# Altium PCB HEPA_CONTROL_PCB.PcbDoc (part 1 of 2)
Units mm, origin at the board's own origin, x right, y up, seen from the top; angles counter-clockwise.
Board outline 243.32 x 101.42 mm, 2 copper layers (Top Layer, Bottom Layer); 86 components, 74 nets, 296 pads, 39 vias.
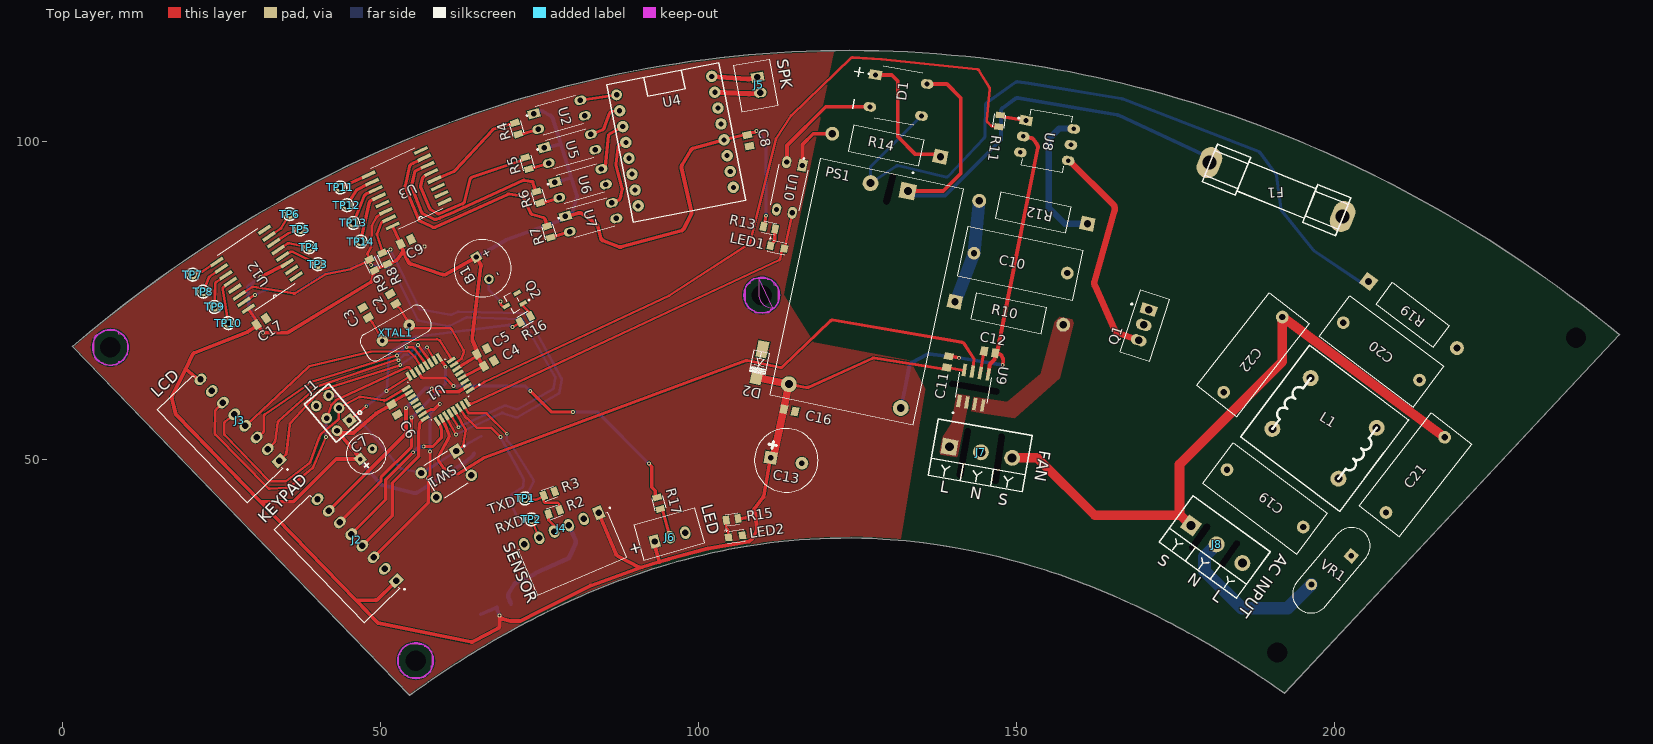
[diagram p0: Top Layer view]
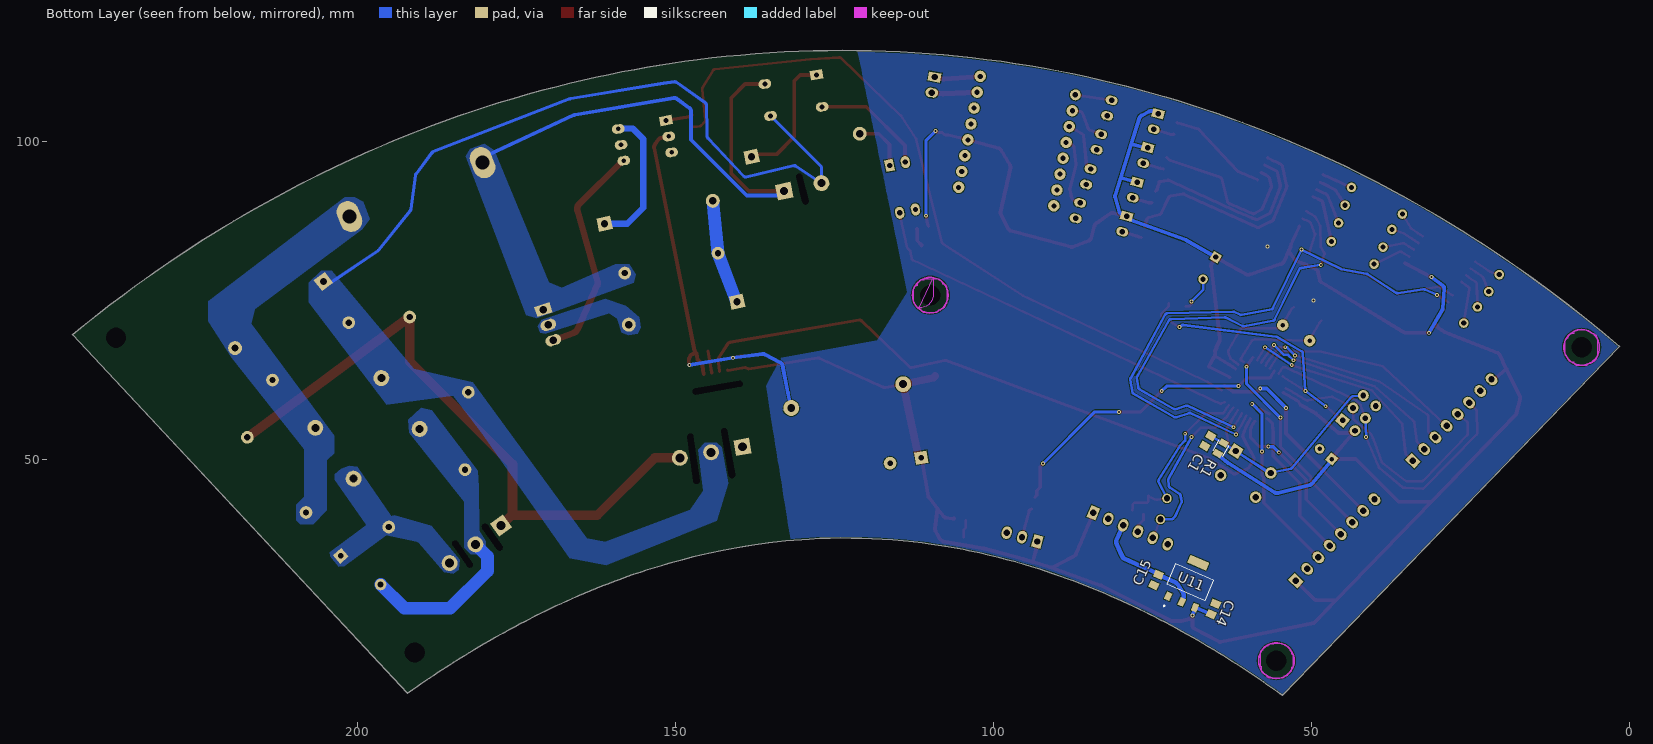
[diagram p1: Bottom Layer view, seen from below]
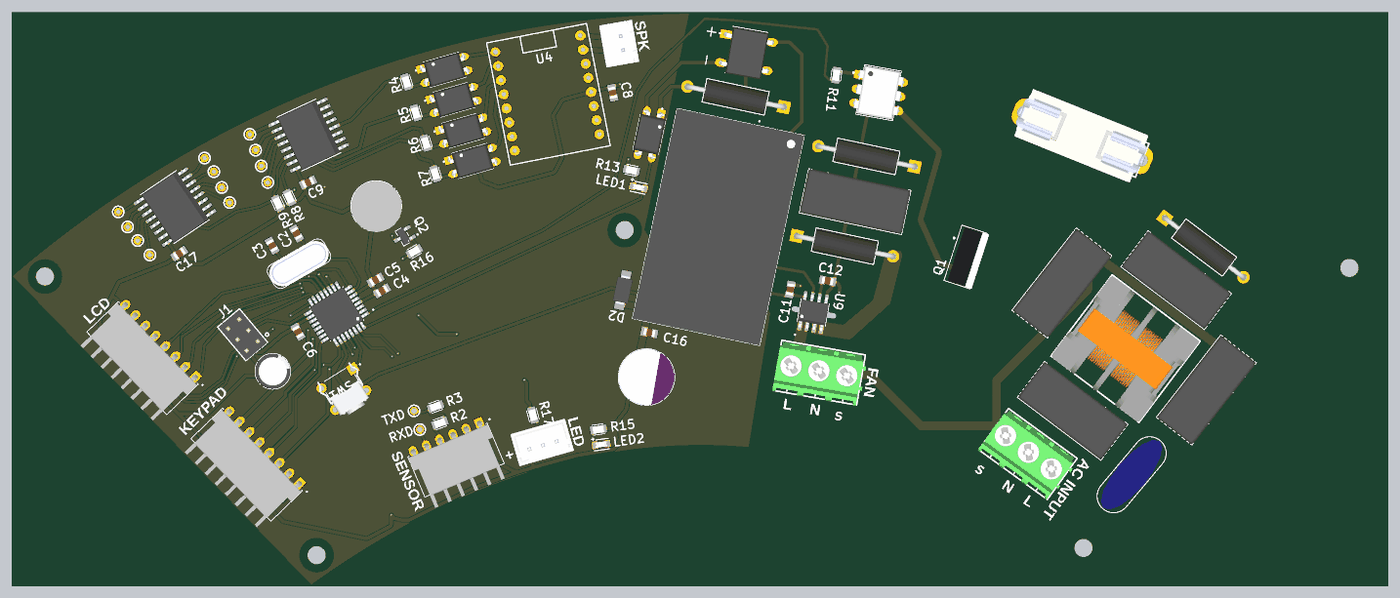
[diagram p3: 3D render of the assembled board from above, using the file's embedded part models]
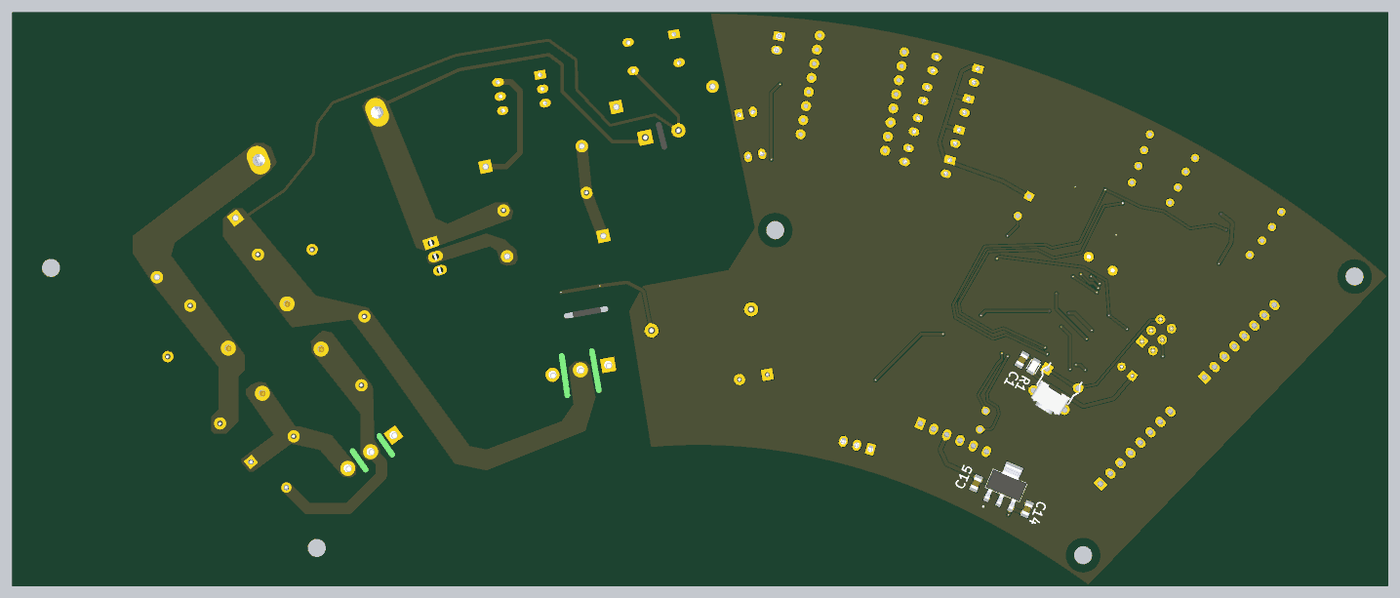
[diagram p4: 3D render of the assembled board from below, using the file's embedded part models]

## Layer stack, top to bottom
Top Solder: solder mask 0.0102, Solder Resist, Dk 3.5
Top Layer: signal copper 0.0356
Dielectric 1: dielectric 0.32, FR-4, Dk 4.8
Bottom Layer: signal copper 0.0356
Bottom Solder: solder mask 0.0102, Solder Resist, Dk 3.5

## Board outline
54.519,12.833 54.661,12.936 55.373,13.443 56.085,13.945 56.797,14.442 57.508,14.933 58.219,15.419 58.929,15.9 59.64,16.375 60.35,16.844 61.06,17.308 61.769,17.767 62.478,18.22 63.187,18.668 63.896,19.111 64.604,19.548 65.312,19.979 66.162,20.49 67.01,20.994 67.859,21.489 68.707,21.977 69.555,22.457 70.402,22.929 71.249,23.394 72.095,23.851 72.941,24.3 73.787,24.742 74.632,25.176 75.477,25.602 76.322,26.021 77.166,26.432 78.01,26.836 78.853,27.232 79.696,27.62 80.538,28.001 81.521,28.435 82.503,28.86 83.484,29.274 84.465,29.677 85.446,30.071 86.426,30.454 87.405,30.827 88.384,31.19 89.502,31.592 90.62,31.981 91.737,32.357 92.853,32.719 93.969,33.068 95.223,33.446 96.476,33.806 97.868,34.187 99.259,34.547 100.649,34.887 102.176,35.237 103.842,35.592 cw(c124.042,-63.45) 105.644,35.942 cw(c123.857,-62.454) 107.584,36.281 cw(c123.693,-61.449) 109.798,36.621 cw(c123.549,-60.431) 112.562,36.972 cw(c123.364,-58.546) 128.936,37.42 cw(c123.313,-59.391) 132.635,37.134 cw(c123.216,-60.409) 135.37,36.831 cw(c123.097,-61.373) 137.557,36.533 cw(c122.947,-62.393) 139.468,36.232 cw(c122.777,-63.411) 141.241,35.918 142.877,35.6 144.376,35.285 145.873,34.946 147.234,34.618 148.594,34.272 149.817,33.944 151.04,33.6 152.262,33.242 153.348,32.91 154.433,32.567 155.518,32.211 156.603,31.844 157.687,31.464 158.635,31.122 159.583,30.772 160.53,30.412 161.477,30.043 162.424,29.665 163.371,29.278 164.317,28.882 165.263,28.477 166.208,28.063 167.153,27.639 167.963,27.27 168.773,26.893 169.582,26.511 170.392,26.121 171.201,25.725 172.009,25.323 172.818,24.914 173.626,24.498 174.434,24.076 175.242,23.647 176.05,23.212 176.857,22.771 177.664,22.323 178.471,21.868 179.278,21.407 180.085,20.94 180.891,20.466 181.697,19.986 182.503,19.499 183.309,19.006 184.115,18.507 184.92,18.001 185.725,17.489 186.53,16.97 187.335,16.445 188.005,16.003 188.676,15.557 189.346,15.105 190.016,14.65 190.686,14.19 191.355,13.726 192.159,13.163 244.849,69.571 244.828,69.548 ccw(c113.264,-89.863) 240.836,72.761 ccw(c114.384,-88.43) 235.058,77.13 ccw(c115.619,-86.734) 228.944,81.416 ccw(c116.759,-85.042) 222.713,85.451 ccw(c117.826,-83.324) 216.141,89.361 ccw(c118.826,-81.566) 209.226,93.117 ccw(c119.74,-79.8) 201.964,96.686 ccw(c120.578,-77.999) 194.353,100.034 ccw(c121.327,-76.192) 186.393,103.126 ccw(c121.985,-74.375) 177.84,106 ccw(c122.55,-72.55) 168.689,108.581 ccw(c123.017,-70.71) 158.435,110.884 ccw(c123.378,-68.851) 146.562,112.798 ccw(c123.712,-65.374) 83.087,109.603 ccw(c124.079,-66.912) 71.147,106.397 ccw(c124.624,-68.708) 62.574,103.546 ccw(c125.254,-70.465) 55.815,100.961 ccw(c125.967,-72.226) 49.847,98.422 ccw(c126.755,-73.995) 44.661,96.014 ccw(c127.603,-75.753) 40,93.684 ccw(c128.51,-77.508) 35.613,91.344 ccw(c129.47,-79.255) 31.739,89.155 ccw(c130.448,-80.94) 28.13,87.008 ccw(c131.512,-82.687) 24.543,84.771 ccw(c132.634,-84.444) 21.218,82.6 ccw(c133.783,-86.167) 18.15,80.513 ccw(c134.977,-87.889) 15.101,78.357 12.305,76.305 9.527,74.193 6.767,72.023 4.254,69.98 1.53,67.695

## Design rules (kind name [scope] priority, off if disabled: settings)
BoardOutlineClearance [All] p1: gap=0.2 ignorepadtopadclearanceinfootprint=FALSE
Clearance [All] p1: gap=0.127 ignorepadtopadclearanceinfootprint=FALSE except(0.25: Arc-Hole Track-Hole SMDPad-Hole THPad-Hole Via-Hole Fill-Hole Poly-Hole Region-Hole Text-Hole)
ComponentClearance [All] p1: gap=0.127 collisioncheckmode=3 verticalgap=0.127 showdistances=TRUE
DiffPairsRouting [All] p1: maxlimit=0.254 minlimit=0.127 mostfreqgap=0.127 toplayer_minwidth=0.127 toplayer_maxwidth=25.4 toplayer_prefwidth=0.127 bottomlayer_minwidth=0.127 bottomlayer_maxwidth=25.4 bottomlayer_prefwidth=0.127 maxuncoupledlength=12.7
Height [All] p1: minheight=0 maxheight=1816.048 prefheight=12.7
HoleSize [All] p1: absolutevalues=TRUE maxlimit=6.3 minlimit=0.3 maxpercent=80.000 minpercent=20.000
HoleToHoleClearance [All] p1: gap=0.25 allowstackedmicrovias=FALSE
MinimumAnnularRing [All] p1: minimumring=0.076
MinimumSolderMaskSliver [All] p1: minsoldermaskwidth=0
PlaneClearance [All] p1: clearance=0.127
PlaneConnect PlaneConnectPowerPads [InPadClass('PowerPads')] p1: planeconnectstyle=Direct reliefexpansion=0.508 reliefentries=4 reliefconductorwidth=0.254 reliefairgap=0.254
PlaneConnect [All] p2: planeconnectstyle=Direct reliefexpansion=0.3 reliefentries=4 reliefconductorwidth=0.127 reliefairgap=0.127
PolygonConnect PolygonConnect_11 [All vs IsNamedPolygon('FAN_CONTROL_L01_P017')] p1: connectstyle=Direct reliefconductorwidth=0.254 reliefentries=4 polygonreliefangle="90 Angle" airgapwidth=0.254
PolygonConnect PolygonConnect_10 [All vs IsNamedPolygon('FAN_OUTPUT_L01_P016')] p2: connectstyle=Direct reliefconductorwidth=0.254 reliefentries=4 polygonreliefangle="90 Angle" airgapwidth=0.254
PolygonConnect PolygonConnect_9 [All vs IsNamedPolygon('FAN_CONTROL_L02_P014')] p3: connectstyle=Direct reliefconductorwidth=0.254 reliefentries=4 polygonreliefangle="90 Angle" airgapwidth=0.254
PolygonConnect PolygonConnect_8 [All vs IsNamedPolygon('NETC10_2_L02_P012')] p4: connectstyle=Direct reliefconductorwidth=0.254 reliefentries=4 polygonreliefangle="90 Angle" airgapwidth=0.254
PolygonConnect PolygonConnect_7 [All vs IsNamedPolygon('NETC10_2_L02_P009')] p5: connectstyle=Direct reliefconductorwidth=0.254 reliefentries=4 polygonreliefangle="90 Angle" airgapwidth=0.254
PolygonConnect PolygonConnect_6 [All vs IsNamedPolygon('NETC10_2_L02_P009')] p6: connectstyle=Direct reliefconductorwidth=0.254 reliefentries=4 polygonreliefangle="90 Angle" airgapwidth=0.254
PolygonConnect PolygonConnect_5 [All vs IsNamedPolygon('NETC19_1_L02_P000')] p7: connectstyle=Direct reliefconductorwidth=0.254 reliefentries=4 polygonreliefangle="90 Angle" airgapwidth=0.254
PolygonConnect PolygonConnect_4 [All vs IsNamedPolygon('NETC19_1_L02_P000')] p8: connectstyle=Direct reliefconductorwidth=0.254 reliefentries=4 polygonreliefangle="90 Angle" airgapwidth=0.254
PolygonConnect PolygonConnect_3 [All vs IsNamedPolygon('NETC20_2_L02_P005')] p9: thpad.connectstyle=Direct thpad.reliefconductorwidth=0.254 thpad.reliefentries=4 thpad.polygonreliefangle="90 Angle" thpad.airgapwidth=0.254 smdpad.connectstyle=Direct smdpad.reliefconductorwidth=0.254 smdpad.reliefentries=4 smdpad.polygonreliefangle="90 Angle" smdpad.airgapwidth=0.254 via.connectstyle=Relief via.reliefconductorwidth=0.254 via.reliefentries=4 via.polygonreliefangle="90 Angle" via.airgapwidth=0.254
PolygonConnect PolygonConnect_2 [All vs IsNamedPolygon('NETC20_2_L02_P005')] p10: thpad.connectstyle=Direct thpad.reliefconductorwidth=0.254 thpad.reliefentries=4 thpad.polygonreliefangle="90 Angle" thpad.airgapwidth=0.254 smdpad.connectstyle=Direct smdpad.reliefconductorwidth=0.254 smdpad.reliefentries=4 smdpad.polygonreliefangle="90 Angle" smdpad.airgapwidth=0.254 via.connectstyle=Relief via.reliefconductorwidth=0.254 via.reliefentries=4 via.polygonreliefangle="90 Angle" via.airgapwidth=0.254
PolygonConnect PolygonConnect_1 [All vs IsNamedPolygon('NETC19_1_L02_P000') Or IsNamedPolygon('NETC19_2_L02_P001') Or IsNamedPolygon('NETC19_2_L02_P002') Or IsNamedPolygon('NETC20_1_L02_P007') Or IsNamedPolygon('NETC20_2_L02_P005')] p11: thpad.connectstyle=Direct thpad.reliefconductorwidth=0.254 thpad.reliefentries=4 thpad.polygonreliefangle="90 Angle" thpad.airgapwidth=0.254 smdpad.connectstyle=Direct smdpad.reliefconductorwidth=0.254 smdpad.reliefentries=4 smdpad.polygonreliefangle="90 Angle" smdpad.airgapwidth=0.254 via.connectstyle=Relief via.reliefconductorwidth=0.254 via.reliefentries=4 via.polygonreliefangle="90 Angle" via.airgapwidth=0.254
PolygonConnect PolygonConnectPowerPads [All vs (InPadClass('PowerPads'))] p12: connectstyle=Direct reliefconductorwidth=0.254 reliefentries=4 polygonreliefangle="90 Angle" airgapwidth=0.254
PolygonConnect [All] p13: thpad.connectstyle=Relief thpad.reliefconductorwidth=0.127 thpad.reliefentries=4 thpad.polygonreliefangle="90 Angle" thpad.airgapwidth=0.127 smdpad.connectstyle=Relief smdpad.reliefconductorwidth=0.127 smdpad.reliefentries=4 smdpad.polygonreliefangle="90 Angle" smdpad.airgapwidth=0.127 via.connectstyle=Direct via.reliefconductorwidth=0.127 via.reliefentries=4 via.polygonreliefangle="90 Angle" via.airgapwidth=0.127
RoutingVias [All] p1: holewidth=0.3 width=0.6 viastyle="Through Hole" minholewidth=0.3 minwidth=0.6 maxholewidth=0.6 maxwidth=6.6
SilkToSilkClearance [All] p1: silktosilkclearance=0
SilkToSolderMaskClearance [IsPad] p1: minsilkscreentomaskgap=0.127 clearancetoexposedcopper=TRUE
SolderMaskExpansion [All] p1: expansion=0.075 istentingtop=FALSE
Width [All] p1: maxlimit=25.4 minlimit=0.127 preferedwidth=0.4 minimp=50.000000 maximp=50.000000 favimp=50.000000
20 further rules are at their usual default settings.

## Classes and differential pairs
polygon class Mains_Polygon: NETC19_1_L02_P000
component class POWER_SUPPLY: C13 C14 C15 C16 D2 LED2 PS1 R15 U11
component class Partical_Sensor: J4 R2 R3 TP1 TP2
component class LCD_Button: J2 J3 J6 R17
component class IO_Expander: B1 C17 Q2 R16 TP3 TP4 TP5 TP6 TP7 TP8 TP9 TP10 U12
component class FAN_Conrol: C10 C11 C12 D1 J7 LED1 Q1 R10 R11 R12 R13 R14 U8 U9 U10
component class EMI_FILTER: C19 C20 C21 C22 F1 J8 L1 R19 VR1
component class Audio: C8 C9 J5 R4 R5 R6 R7 R8 R9 TP11 TP12 TP13 TP14 U2 U3 U4 U5 U6 U7
component class Atmega328P: C1 C2 C3 C4 C5 C6 C7 J1 R1 SW1 U1 XTAL1

## Components (designator, comment, footprint, x,y, rotation, side; value= is the part's Value field where it differs from the comment)
B1 "CST-951AP" CUI_CST-951AP 66.04,80.01 r300 top
C1 "104pF" CAPC2012X140N 66.294,52.832 r120 bottom
C2 "22pF" CAPC2012X140N 51.943,75.184 r300 top
C3 "22pF" CAPC2012X140N 47.625,73.025 r300 top
C4 "104pF" CAPC2012X140N 67.056,65.024 r210 top
C5 "104pF" CAPC2012X140N 65.913,66.929 r210 top
C6 "104pF" CAPC2012X140N 52.197,57.785 r120 top
C7 "10uF" CAPPRD250W50D630H1250 47.752,50.8 r40 top
C8 "104pF" CAPC2012X140N 107.823,100.076 r102 top
C9 "104pF" CAPC2012X140N 53.975,84.201 r205 top
C10 "104K" CAPRR1500W60L1850T800H1650 150.652,80.807 r348 top
C11 "104pF" CAPC2012X140N 139.192,65.278 r260 top
C12 "1nF" CAPC2012X140N 145.796,66.802 r170 top
C13 "470uF" CAPPRD500W60D1000H1300 113.792,49.784 r350 top
C14 "104pF" CAPC2012X140N 65.405,26.416 r293 bottom
C15 "104pF" CAPC2012X140N 74.422,30.988 r114 bottom
C16 "104pF" CAPC2012X140N 114.3,57.658 r168 top
C17 "104pF" CAPC2012X140N 31.242,71.628 r214 top
C19 "10nF" CAPRR1500W60L1850T800H1650 189.103,43.815 r323 top
C20 "10nF" CAPRR1500W60L1850T800H1650 207.391,66.929 r323 top
C21 "4.7nF" CAPRR1500W60L1850T800H1650 212.725,47.498 r232 top
C22 "4.7nF" CAPRR1500W60L1850T800H1650 187.198,66.421 r232 top
D1 "DB107-BP" DIP825W50P509L880H320Q4 131.445,107.188 r350 top
D2 "SML4733" DO-214AC 109.601,65.151 r258 top
F1 "5A" "Fuse 5X20mm" 201.295,88.138 r158 top
J1 "AVRISP Header" AVRISP_Header 45.085,56.093 r130 top
J2 "8way Connector" TE_640455-8 52.424,30.89 r314 top
J3 "8way Connector" TE_640455-8 34.022,49.735 r314 top
J4 "6way Connector" TE_640455-6 84.282,41.562 r23 top
J5 "CONN HEADER VERT 2POS 2.5MM" JST_B2B-XH-A(LF)(SN) 109.474,108.839 r100 top
J6 "CONN HEADER VERT 3POS 2.5MM" JST_B3B-XH-A(LF)(SN) 95.504,37.719 r16 top
J7 "1935174" PHOENIX_1935174 144.399,51.054 r350 top
J8 "1935174" PHOENIX_1935174 181.483,36.576 r324 top
L1 "100uH" UU10.5-10mH 196.264,62.723 r323 top
LED1 "LED_0603" LED_KP-2012 112.395,83.312 r348 top
LED2 "LED_0603" LED_KP-2012 105.791,37.846 r8 top
PS1 "HLK-5M05" CONV_HLK-5M05 126.492,76.327 r258 top
Q1 "BTA16-600CW3G" TO254P1028X482X1968-3 170.795,73.507 r252 top
Q2 "2STR1215" SOT95P280X125-3N 70.866,74.676 r210 top
R1 "10K" RESC2012X65N 64.262,51.689 r300 bottom
R2 "1K" RESC2012X65N 77.282,41.646 r200 top
R3 "2K" RESC2012X65N 76.52,44.567 r200 top
R4 "1K" RESC2012X65N 71.374,101.981 r107 top
R5 "1K" RESC2012X65N 73.025,96.52 r107 top
R6 "1K" RESC2012X65N 74.803,91.186 r107 top
R7 "1K" RESC2012X65N 76.454,85.725 r107 top
R8 "2K2" RESC2012X65N 50.673,81.534 r295 top
R9 "2K2" RESC2012X65N 48.641,80.518 r295 top
R10 "560" RES_ROX2S_TYCO_TYC 140.332,74.738 r348 top
R11 "330 Ohm" RESC2012X65N 147.323,103.161 r82 top
R12 "1K" RES_ROX2S_TYCO_TYC 161.163,86.995 r168 top
R13 "1K" RESC2012X65N 111.125,86.36 r168 top
R14 "100K" RES_ROX2S_TYCO_TYC 138.049,97.536 r168 top
R15 "1K" RESC2012X65N 105.283,40.513 r8 top
R16 "1K" RESC2012X65N 72.771,72.009 r210 top
R17 "330" RESC2012X65N 93.726,43.053 r285 top
R19 "220K" RES_ROX2S_TYCO_TYC 205.378,77.919 r323 top
SW1 "" SW_TL1105F160Q 60.325,47.625 r212 top
TP1 "TP" TESTPAD-TH#1 72.71,43.805 r180 top
TP2 "TP" TESTPAD-TH#1 73.726,40.503 r180 top
TP3 "TP" TESTPAD-TH#2 40.132,80.645 r0 top
TP4 "TP" TESTPAD-TH#2 38.735,83.312 r0 top
TP5 "TP" TESTPAD-TH#2 37.338,86.106 r0 top
TP6 "TP" TESTPAD-TH#2 35.687,88.519 r0 top
TP7 "TP" TESTPAD-TH#2 20.447,78.994 r0 top
TP8 "TP" TESTPAD-TH#2 22.098,76.327 r0 top
TP9 "TP" TESTPAD-TH#2 23.876,73.914 r0 top
TP10 "TP" TESTPAD-TH#2 26.035,71.374 r0 top
TP11 "TP" TESTPAD-TH#2 43.688,92.71 r90 top
TP12 "TP" TESTPAD-TH#2 44.704,89.916 r90 top
TP13 "TP" TESTPAD-TH#2 45.72,87.122 r90 top
TP14 "TP" TESTPAD-TH#2 46.863,84.201 r90 top
U1 "ATMEGA328P-AU" QFP80P900X900X120-32N 59.055,60.96 r212 top
U2 "PC817" DIP762W50P254L495H455Q4 78.105,104.14 r16 top
U3 "PCF8574T" SOIC127P1032X265-16N 54.102,92.583 r205 top
U4 "JQ6500" JQ6500 87.114,107.268 r11 top
U5 "PC817" DIP762W50P254L495H455Q4 79.756,98.806 r16 top
U6 "PC817" DIP762W50P254L495H455Q4 81.407,93.345 r16 top
U7 "PC817" DIP762W50P254L495H455Q4 83.058,88.011 r16 top
U8 "MOC3021" DIP762W45P254L889H508Q6 154.813,100.076 r350 top
U9 "ACS712ELCTR" SOIC127P600X175-8N 143.256,61.214 r80 top
U10 "PC817" DIP762W50P254L495H455Q4 114.3,92.71 r258 top
U11 "AMS1117-3.3" SOT229P700X180-4N 69.088,30.607 r113 bottom
U12 "PCF8574T" SOIC127P1032X265-16N 30.476,79.842 r214 top
VR1 "S14K561" VRES_B72214_2301_EPC 199.517,32.512 r230 top
XTAL1 "16MHz" XTAL_ECS-160-20-16X 52.39,69.84 r30 top

## Footprints (in the part's own frame and the unit in brackets; to place one, negate y for a bottom-side part, rotate by r counter-clockwise, add the part's x,y. Pads: shape width x height; smd on the part's side, far side on the other; paste and mask are expansions set on the pad)
AVRISP_Header [mm]
  rect 1.7x1.7 hole 0.9: 1(0,0)
  round 1.7 hole 0.9: 2(0,2.54) 3(2.54,0) 4(2.54,2.54) 5(5.08,0) 6(5.08,2.54)
  silkscreen extent -1.27,-2.32 6.5,3.81, body extent -1.27,-1.15 6.35,3.68, height 8.38
CAPC2012X140N [mm]
  rect 1.15x1.45 smd: 1(-0.9,0) 2(0.9,0)
  body extent -1.01,-0.63 1.01,0.63, height 0.94
CAPPRD250W50D630H1250 [mm]
  rect 1.5x1.5 hole 0.7: 1(-1.25,0)
  round 1.5 hole 0.7: 2(1.25,0)
  silkscreen extent -3.15,-3.15 3.15,3.15, body extent -3.15,-3.15 3.15,3.15, height 12.63
CAPPRD500W60D1000H1300 [mm]
  rect 2x2 hole 0.85: 1(-2.5,0)
  round 2 hole 0.85: 2(2.5,0)
  silkscreen extent -5,-5 5,5, body extent -5,-5 5,5, height 13
CAPRR1500W60L1850T800H1650 [mm]
  round 2 hole 1: 1(-7.5,0) 2(7.5,0)
  silkscreen extent -9.25,-4 9.25,4, body extent -9.25,-3.94 9.25,4.06, height 16.5
CONV_HLK-5M05 [mm]
  rect 2.5x2.5 hole 1.25: 1(-16.8,3)
  round 2.5 hole 1.25: 2(-16.8,-3) 3(16.8,9) 4(16.8,-9)
  silkscreen extent -19.9,-11.5 19,11.5, body extent -19,-11.5 19,11.5, height 18
CUI_CST-951AP [mm]
  round 1.5 hole 0.8: M(2,0)
  rect 1.5x1.5 hole 0.8: P(-2,0)
  silkscreen extent -4.5,-4.5 4.5,4.5, body extent -4.43,-4.5 4.57,4.5, height 4.5
DIP762W45P254L889H508Q6 [mm]
  rect 2x1.5 hole 0.73: 1(-3.81,2.54)
  oval 2x1.5 hole 0.73: 2(-3.81,0) 3(-3.81,-2.54) 4(3.81,-2.54) 5(3.81,0) 6(3.81,2.54)
  silkscreen extent -5.12,-4.45 3.3,4.45, body extent -3.94,-4.26 3.94,4.26, height 5.84
DIP762W50P254L495H455Q4 [mm]
  rect 1.9x1.4 hole 0.84: 1(-3.81,1.27)
  oval 1.9x1.4 hole 0.84: 2(-3.81,-1.27) 3(3.81,-1.27) 4(3.81,1.27)
  silkscreen extent -5.01,-2.3 3.25,2.3, body extent -3.93,-2.3 3.93,2.3, height 4.55
DIP825W50P509L880H320Q4 [mm]
  rect 2x1.5 hole 0.79: 1(-4.125,2.55)
  oval 2x1.5 hole 0.79: 2(-4.125,-2.55) 3(4.125,-2.55) 4(4.125,2.55)
  silkscreen extent -7.49,-4.15 3.18,4.15, body extent -4.07,-4.27 4.33,4.01, height 3.3
DO-214AC [mm]
  rect 2.65x1.75 smd: 1(-2.15,0) 2(2.15,0)
  silkscreen extent -1.78,-1.25 1.65,1.25, body extent -2.61,-1.37 2.59,1.35, height 2.67
"Fuse 5X20mm" [mm]
  oval 3.5x5 hole 2.2: 1(0,0) 2(22.6,0)
  silkscreen extent -0.1,-3.2 22.5,3.2, body extent -0.4,-4.5 23.4,4.5, height 13.5
JQ6500 [mm]
  round 1.7 hole 0.9: 1(0,0)
  round 1.8 hole 0.8: 2(0,-2.54) 3(0,-5.08) 4(0,-7.62) 5(0,-10.16) 6(0,-12.7) 7(0,-15.24) 8(0,-17.78) 9(15.24,-17.78) 10(15.24,-15.24) 11(15.24,-12.7) 12(15.24,-10.16) 13(15.24,-7.62) 14(15.24,-5.08) 15(15.24,-2.54) 16(15.24,0)
  silkscreen extent -1.25,-20.13 16.75,1.87
JST_B2B-XH-A(LF)(SN) [mm]
  rect 1.508x2 hole 1: 1(1.25,0)
  oval 1.508x2 hole 1: 2(-1.25,0)
  silkscreen extent -3.7,-2.35 3.7,3.4, body extent -3.7,-2.32 3.7,3.43, height 7
JST_B3B-XH-A(LF)(SN) [mm]
  rect 1.508x2 hole 1: 1(-2.5,0)
  oval 1.508x2 hole 1: 2(0,0) 3(2.5,0)
  silkscreen extent -4.95,-2.35 4.95,3.4, body extent -4.95,-2.35 4.95,3.4, height 7
LED_KP-2012 [mm]
  rect 1.1x1.25 smd paste-0.102: 1(-1.1,0) 2(1.1,0)
  silkscreen extent -1.57,-0.94 1.34,1.37, body extent -1.03,-0.43 1.03,0.47, height 0.85
PHOENIX_1935174 [mm]
  rect 2.5x2.5 hole 1.4: 1(-5,0)
  round 2.5 hole 1.4: 2(0,0) 3(5,0)
  silkscreen extent -7.5,-5 7.5,4, body extent -7.71,-5.19 7.96,3.81, height 11.3
QFP80P900X900X120-32N [mm]
  rrect25% 1.47x0.55 smd: 1(-4.17,2.8) 2(-4.17,2) 3(-4.17,1.2) 4(-4.17,0.4) 5(-4.17,-0.4) 6(-4.17,-1.2) 7(-4.17,-2) 8(-4.17,-2.8) 17(4.17,-2.8) 18(4.17,-2) 19(4.17,-1.2) 20(4.17,-0.4) 21(4.17,0.4) 22(4.17,1.2) 23(4.17,2) 24(4.17,2.8)
  rrect25% 0.55x1.47 smd: 9(-2.8,-4.17) 10(-2,-4.17) 11(-1.2,-4.17) 12(-0.4,-4.17) 13(0.4,-4.17) 14(1.2,-4.17) 15(2,-4.17) 16(2.8,-4.17) 25(2.8,4.17) 26(2,4.17) 27(1.2,4.17) 28(0.4,4.17) 29(-0.4,4.17) 30(-1.2,4.17) 31(-2,4.17) 32(-2.8,4.17)
  silkscreen extent -5.94,-3.5 3.5,3.5, body extent -4.5,-4.5 4.5,4.5, height 1.2
RES_ROX2S_TYCO_TYC [mm]
  rect 2.2x2.2 hole 1.143 mask+0: 1(0,0)
  round 2.2 hole 1.143 mask+0: 2(17.402,0)
  silkscreen extent 3.07,-2.12 14.33,2.12, body extent -0.44,-1.99 17.85,1.99, height 3.99
RESC2012X65N [mm]
  rrect25% 1x1.42 smd: 1(-0.935,0) 2(0.935,0)
  silkscreen extent -1,-0.89 1,0.89, body extent -1,-0.63 1,0.63, height 0.6
SOIC127P600X175-8N [mm]
  rrect25% 1.97x0.6 smd: 1(-2.475,1.905) 2(-2.475,0.635) 3(-2.475,-0.635) 4(-2.475,-1.905) 5(2.475,-1.905) 6(2.475,-0.635) 7(2.475,0.635) 8(2.475,1.905)
  silkscreen extent -4.54,-2.52 2,2.6, body extent -3,-2.45 3,2.45, height 1.75
SOIC127P1032X265-16N [mil]
  rect 90x22 smd: 1(-178,175) 2(-178,125) 3(-178,75) 4(-178,25) 5(-178,-25) 6(-178,-75) 7(-178,-125) 8(-178,-175) 9(178,-175) 10(178,-125) 11(178,-75) 12(178,-25) 13(178,25) 14(178,75) 15(178,125) 16(178,175)
  silkscreen extent -150,-206 150,207, body extent -203,-203 203,203, height 104
SOT95P280X125-3N [mm]
  rect 1.22x0.6 smd: 1(-1.245,0.95) 2(-1.245,-0.95) 3(1.245,0)
  silkscreen extent -2.4,-1.51 0.84,1.51, body extent -1.19,-1.46 1.19,1.46, height 1.11
SOT229P700X180-4N [mm]
  rrect15% 1.31x0.93 smd: 1(-3.345,2.29) 2(-3.345,0) 3(-3.345,-2.29)
  rrect15% 1.31x3.24 smd: 4(3.345,0)
  silkscreen extent -5.1,-3.25 1.75,3.25, body extent -3.5,-3.25 3.5,3.25, height 1.8
SW_TL1105F160Q [mm]
  rect 1.8x1.8 hole 1: 1(-3.25,-2.25)
  round 1.8 hole 1: 1(3.25,-2.25) 2(-3.25,2.25) 2(3.25,2.25)
  silkscreen extent -4.85,-3 3,3, body extent -3.95,-3 3.95,3, height 4.3
TE_640455-6 [mm]
  rect 1.5x2 hole 1.02: 1(0,0)
  oval 1.5x2 hole 1.02: 2(-2.54,0) 3(-5.08,0) 4(-7.62,0) 5(-10.16,0) 6(-12.7,0)
  silkscreen extent -13.97,-8.2 2.02,0.1, body extent -13.97,-10.67 1.27,0.38, height 6.44
TE_640455-8 [mm]
  rect 1.5x2 hole 1.02: 1(0,0)
  oval 1.5x2 hole 1.02: 2(-2.54,0) 3(-5.08,0) 4(-7.62,0) 5(-10.16,0) 6(-12.7,0) 7(-15.24,0) 8(-17.78,0)
  silkscreen extent -19.05,-8.2 2.02,0.1, body extent -19.05,-10.67 1.27,0.38, height 6.54
TESTPAD-TH#1 [mm]
  round 1.5 hole 1: 1(0,0)
  silkscreen extent -1,-1 1,1
TESTPAD-TH#2 [mm]
  round 1.5 hole 0.8: 1(0,0)
  silkscreen extent -1,-1 1,1
TO254P1028X482X1968-3 [mm]
  rect 1.7x2.5 hole 1.19: 1(0,0)
  oval 1.7x2.5 hole 1.19: 2(2.54,0) 3(5.08,0)
  silkscreen extent -2.6,-2.9 7.68,2.64, body extent -2.51,-1.58 7.59,2.92, height 18.9
UU10.5-10mH [mm]
  round 2.5 hole 1.25: 1(0,0) 2(0,-10) 3(13,-10) 4(13,0)
  silkscreen extent -3.25,-14 16.25,4, body extent -3.27,-14.1 16.23,3.9, height 23.08
VRES_B72214_2301_EPC [mm]
  rect 1.8x1.8 hole 0.914 mask+0: 1(-3.75,0.95)
  round 1.8 hole 0.914 mask+0: 2(3.75,-0.95)
  silkscreen extent -7.87,-2.92 7.87,2.92, body extent -7.75,-2.79 7.75,2.79, height 18.49
XTAL_ECS-160-20-16X [mm]
  round 1.8 hole 0.7: 1(-2.44,0) 2(2.44,0)
  silkscreen extent -5.68,-2.33 5.68,2.33, body extent -5.68,-2.33 5.68,2.33, height 3.5

## Part data
B1: "9 mm, 5 V, 85 dB, Through Hole, Magnetic Audio Transducer B", Manufacturer Part Number=CST-951AP, Part Number=CST-951AP, Pin Count=2, Publisher="Metal Circuits"
C1 C2 C3 C4 C5 C6 C8 C9 C11 C12 C14 C15 C16 C17: library part CAP_0805, Part Number=CAP_0805, Pin Count=2, Publisher="Metal Circuits"
C7: library part "Electrolytic Capacitor 6.3mm", "Ø6.3 x 11mm LS=2.5mm Radial Aluminum Electrolytic Cap", Manufacturer Part Number="Cap Electrolytic", Footprint Doc=Radial, Part Number="Cap Electrolytic", Pin Count=2, Publisher="Metal Circuits"
C10: library part "0.1uF 300V", "Capacitor, Metalized Polypropylene Film,300VAC, 0.1uF, +-10%", Manufacturer Part Number="100nF 300V", Part Number="100nF 300V", Pin Count=2, Publisher="Metal Circuits"
C13: library part "Electrolytic Capacitor", "Aluminum Electrolytic Capacitors - Radial Leaded", Manufacturer Part Number="Cap Electrolytic", Footprint Doc=Radial-2, Part Number="Cap Electrolytic", Pin Count=2, Publisher="Metal Circuits"
C19 C20: library part "0.1uF 300V", "Capacitor, Metalized Polypropylene Film,300VAC, 10nF, +-10%", Manufacturer Part Number="10nF 300V", Part Number="10nF 300V", Pin Count=2, Publisher="Metal Circuits"
C21 C22: library part "0.1uF 300V", "Capacitor, Metalized Polypropylene Film,300VAC, 4.7nF, +-10%", Manufacturer Part Number="4.7nF 300V", Part Number="4.7nF 300V", Pin Count=2, Publisher="Metal Circuits"
D1: "Bridge Rectifier Single Phase Standard 1 kV Through Hole DB-1", Manufacturer=MCC, Manufacturer Part Number=DB107-BP, Part Number=DB107-BP, Pin Count=4, Publisher="Metal Circuits"
D2: "Zener Diode Single 5.1V 10% 7Ohm 1000mW 2-Pin SMA", Footprint Doc=DO-214AC, Manufacturer Part Number=SML4733, Part Number=SML4733, Pin Count=2, Publisher="Metal Circuits"
F1: library part Fuse, "5x20 Fuse Holders ROHS", Manufacturer Part Number="Fuse Holder", Part Number="Fuse Holder", Pin Count=2, Publisher="Metal Circuits"
J1: library part 67997-206HLF, "AVR ISP Programming 2x3 Header male 2.54mm pith", Manufacturer="Amphenol ICC (FCI)", Manufacturer Part Number=67997-206HLF, Part Number=67997-206HLF, Pin Count=6, Publisher="Metal Circuits"
J2 J3: library part "JST 8Way", "6Way Right Angle JST-XH connector Male 2.54mm Pitch", Manufacturer Part Number=JST-XH, Part Number=JST-XH, Pin Count=6, Publisher="Metal Circuits"
J4: library part "JST 6Way Connector RA", "6Way Right Angle JST-XH connector Male 2.54mm Pitch", Manufacturer Part Number=JST-XH, Part Number=JST-XH, Pin Count=6, Publisher="Metal Circuits"
J5: library part B2B-XH-A(LF)(SN), "Connector Header Through Hole 2 position 0.098\" (2.50mm)", Manufacturer="JST Sales America Inc.", Supplier Part Number 1=455-2247-ND, HelpURL=https://www.jst-mfg.com/product/pdf/eng/eXH.pdf, Manufacturer Part Number=B2B-XH-A(LF)(SN), Part Number=B2B-XH-A(LF)(SN), Pin Count=2, Publisher="Metal Circuits", Supplier 1=Digi-Key
J6: library part B3B-XH-A(LF)(SN), "Connector Header Through Hole 3 position 0.098\" (2.50mm)", Manufacturer="JST Sales America Inc.", Supplier Part Number 1=455-2248-ND, HelpURL=https://www.jst-mfg.com/product/pdf/eng/eXH.pdf, Manufacturer Part Number=B3B-XH-A(LF)(SN), Part Number=B3B-XH-A(LF)(SN), Pin Count=3, Publisher="Metal Circuits", Supplier 1=Digi-Key
J7 J8: "3 Position Wire to Board Terminal Block Horizontal with Board 0.197\" (5.00mm) Through Hole", Manufacturer="Phoenix Contact", Manufacturer Part Number=1935174, Part Number=1935174, Pin Count=3, Publisher="Metal Circuits"
L1: library part UU10.5-10mH, "100uH@1kHz 1.5Ω 2 Plugin Common Mode Filters ROHS", Manufacturer="FH (Guangdong Fenghua Advanced Tech)", Manufacturer Part Number=UU10.5-100uH, Supplier Part Number 1=C191661, Part Number=UU10.5-100uH, Pin Count=4, Publisher="Metal Circuits", Supplier 1=LCSC
LED1 LED2: "LED SMD 0603", Manufacturer Part Number=LED_0603, Part Number=LED_0603, Pin Count=2, Publisher="Metal Circuits"
PS1: "5V 1A 90VAC~265VAC 120V~350V 5W AC-DC 69% Plugin Power Modules ROHS", Manufacturer=HI-LINK, Manufacturer Part Number=HLK-5M05, Part Number=HLK-5M05, Pin Count=4, Publisher="Metal Circuits"
Q1: "TRIAC Standard 600V 16A Through Hole TO-220AB", Manufacturer="Littelfuse Inc.", Manufacturer Part Number=BTA16-600CW3G, Part Number=BTA16-600CW3G, Pin Count=3, Publisher="Metal Circuits"
Q2: "Bipolar (BJT) Transistor NPN 15 V 1.5 A - 500 mW Surface Mount SOT-23-3", Manufacturer=ST, Footprint Doc=SOT-23, Manufacturer Part Number=2STR1215, Part Number=2STR1215, Pin Count=3, Publisher="Metal Circuits"
R1 R2 R3 R4 R5 R6 R7 R8 R9 R11 R13 R15 R16 R17: library part RES_0805, "RES SMD 1% 1/10W 0805", Footprint Doc=0805, Part Number=RES_0805, Pin Count=2, Publisher="Metal Circuits"
R10: library part "RES 2Watt", "Carbon Film Through Hole Resistor 2Watt 1%", Part Number="RES 2 Watt", Pin Count=2, Publisher="Metal Circuits"
R12 R14 R19: library part "RES 1Watt", "Carbon Film Through Hole Resistor 1Watt 1%", Part Number="RES 1 Watt", Pin Count=2, Publisher="Metal Circuits"
SW1: library part SW-PB, "Tactile Switch, SPNO, Through Hole", Manufacturer Part Number=SW-PB, Part Number=SW-PB, Pin Count=4, Publisher="Metal Circuits"
TP1 TP2 TP3 TP4 TP5 TP6 TP7 TP8 TP9 TP10 TP11 TP12 TP13 TP14: library part TESTPAD_TH, "Testpoint, through hole", Part Number="Testpoint TH", Artikkelnr Noca=N.A., Artikkelnr Simpro=N.A., Footprint Doc=TESTPAD-TH, LatestRevisionDate=2009-12-12, Pin Count=1, Published=2009-12-12, Publisher="Nordic Semiconductor"
U1: "AVR AVR® ATmega Microcontroller IC 8-Bit 20MHz 32KB (16K x 16) FLASH 32-TQFP (7x7)", Manufacturer="Microchip Technology", Supplier Part Number 1=ATMEGA328P-AU-ND, Footprint Doc=32-TQFP, HelpURL=https://ww1.microchip.com/downloads/en/DeviceDoc/ATmega48A-PA-88A-PA-168A-PA-328-P-DS-DS40002061B.pdf, Manufacturer Part Number=ATMEGA328P-AU, Part Number=ATMEGA328P-AU, Pin Count=32, Publisher="Metal Circuits", Supplier 1=Digi-Key
U2 U5 U6 U7 U10: "Optoisolator Transistor Output - 1 Channel 4-DIP", Manufacturer=SHARP, Footprint Doc=DIP-4, Manufacturer Part Number=PC817, Part Number=PC817, Pin Count=4, Publisher="Metal Circuits"
U3 U12: library part PCF8574T/3,518, "IC XPNDR 100KHZ I2C 16SO", Manufacturer=NXP, Footprint Doc=SOIC-16, Manufacturer Part Number=PCF8574T/3,518, Part Number=PCF8574T/3,518, Pin Count=16, Publisher="Metal Circuits"
U4: "JQ6500-16P with onboard 16Mbit (2 Mega Byte) Flash memory.", Manufacturer Part Number=JQ6500, Part Number=JQ6500, Pin Count=16, Publisher="Metal Circuits"
U8: "Optoisolator Triac Output 5000Vrms 1 Channel 6-DIP", Manufacturer=Lite-On, Manufacturer Part Number=MOC3021, Part Number=MOC3021, Pin Count=6, Publisher="Metal Circuits"
U9: library part ACS712ELCTR-05B-T, "Current Sensor 5A 1 Channel Hall Effect, Open Loop Bidirectional 8-SOIC (0.154\", 3.90mm Width)", Footprint Doc=SOIC-8, Manufacturer Part Number=ACS712ELCTR, Part Number=ACS712ELCTR, Pin Count=8, Publisher="Metal Circuits"
U11: "Sot223/Pkg 1-Amp 3.3-Volt Low Drop Out Voltage Regulatator", Manufacturer=AMS, Footprint Doc=SOT-223, Manufacturer Part Number=AMS1117-3.3, Part Number=AMS1117-3.3, Pin Count=4, Publisher="Metal Circuits"
VR1: library part S14K230, "Tv - Varistors, Mov Circuit Protection 4.5kA 470V", Manufacturer Part Number=S14K561, Part Number=S14K561, Pin Count=2, Publisher="Metal Circuits"
XTAL1: library part ECS-40-20-4, "16 MHz ±30ppm Crystal 20pF 150 Ohms HC-49/US", Manufacturer="ECS Inc.", Footprint Doc=XTAL_ECS-160-20-16X, Manufacturer Part Number=ECS-40-20-4, Part Number=ECS-40-20-4, Pin Count=2, Publisher="Metal Circuits"

## Free pads (board coordinates)
  round 1.8 hole 3.2: 4(7.493,67.564) 4(55.499,18.288) 4(109.937,75.765) 4(191.008,19.558) 4(237.998,69.088)
  round 0.8 hole 1 slot 5 at 76 deg unplated: 5(130.048,92.456)
  round 0.8 hole 1 slot 8 at 80 deg unplated: 5(141.732,50.927)
  round 0.8 hole 1 slot 8 at 170 deg unplated: 5(143.383,61.214)
  round 0.8 hole 1 slot 8 at 82 deg unplated: 5(147.193,50.038)
  round 0.8 hole 1 slot 5 at 55 deg unplated: 5(178.816,37.719) 5(183.515,35.052)

## Via types
v1: diameter 0.6, hole 0.3, Top Layer to Bottom Layer, tented both sides, 39 vias

## Nets (pads, with @x,y where several pads share a name; then routed paths per layer and width w, separated by ;. In a path a pad name is that pad's centre, name@x,y a point inside that pad or via, vN(x,y) a via of type N, cw(c..) or ccw(c..) an arc to the next point about the centre after c; other vN are vias at no path point)
3V3: C15.2 J4.3 U11.2 | length 23.8
  Bottom Layer w0.7: U11.2@70.5,27.241 U11.2@70.395,27.528 70.106,28.253 70.105,28.255 ; J4.3@79.606,39.577 79.704,39.347 80.644,37.244 ; 70.105,28.255 cw(c70.756,28.512) 70.156,28.874 ; 70.105,28.255 cw(c70.756,28.512) 70.156,28.874 ; 70.105,28.255 cw(c70.756,28.512) 70.156,28.874 ; 70.105,28.255 cw(c70.756,28.512) 70.156,28.874 ; 70.156,28.874 71.008,30.293 cw(c71.608,29.933) 71.323,30.572 73.721,31.64 C15.2@74.056,31.81 74.352,32.067 79.385,34.308 ; 79.385,34.308 ccw(c79.1,34.948) 79.739,34.661 ; 79.385,34.308 ccw(c79.1,34.948) 79.739,34.661 ; 79.385,34.308 ccw(c79.1,34.948) 79.739,34.661 ; 79.385,34.308 ccw(c79.1,34.948) 79.739,34.661 ; 79.739,34.661 80.643,36.671 ; 80.643,36.671 ccw(c80.005,36.959) 80.644,37.244 ; 80.643,36.671 ccw(c80.005,36.959) 80.644,37.244 ; 80.643,36.671 ccw(c80.005,36.959) 80.644,37.244 ; 80.643,36.671 ccw(c80.005,36.959) 80.644,37.244
EARTH: C21.1 C22.1 J7.3 J8.1 | length 102.3
  Top Layer w1.5: J7.3@149.323,50.186 153.268,50.186 162.306,41.148 175.805,41.148 ; J8.1@177.438,39.515 175.805,41.148 ; C21.1@217.342,53.408 C22.1@191.815,72.331 191.815,65.331 175.641,49.156 175.641,41.312 175.805,41.148
Fan_Control: Q1.2 R10.2 U9.3 U9.4
FAN_OUTPUT: J7.1 U9.1 U9.2
GND: C1.1 C2.1 C3.1 C4.1 C5.1 C6.1 C7.2 C8.1 C9.1 C11.1 C12.1 C13.2 C14.1 C15.1 C16.1 C17.1 D2.1 J1.6 J2.2 J3.7 J4.2 J6.3 LED2.2 PS1.3 Q2.2 R3.1 SW1.2 U1.3 U1.5 U1.21 U2.3 U3.1 U3.2 U3.3 U3.8 U4.6 U4.11 U5.3 U6.3 U7.3 U8.2 U9.5 U10.3 U11.1 U12.1 U12.2 U12.8 | length 84.3
  Top Layer w0.6: C11.1@139.348,66.164 139.773,66.124 v1(140.97,65.913) ; U9.5@145.562,63.321 145.681,63.995 145.77,64.694 ; 146.579,65.834 146.647,66.22 C12.1@146.682,66.646 ; v1(147.828,64.77) 147.928,65.473 ; U8.2@151.061,100.738 151.307,100.694 152.289,100.503 ; 153.268,99.399 152.666,100.258 ; 145.77,64.695 cw(c146.365,64.618) 145.94,65.041 ; 145.77,64.695 cw(c146.365,64.618) 145.94,65.041 ; 145.77,64.695 cw(c146.365,64.618) 145.94,65.041 ; 145.77,64.695 cw(c146.365,64.618) 145.94,65.041 ; 145.94,65.041 146.413,65.514 ; 145.94,65.041 146.413,65.514 ; 145.94,65.041 146.413,65.514 ; 146.413,65.514 ccw(c145.988,65.938) 146.579,65.834 ; 146.413,65.514 ccw(c145.988,65.938) 146.579,65.834 ; 146.413,65.514 ccw(c145.988,65.938) 146.579,65.834 ; 146.413,65.514 ccw(c145.988,65.938) 146.579,65.834 ; C12.1@146.682,66.646 C12.1@146.945,66.554 ; C12.1@146.682,66.646 147.027,67.017 153.364,98.938 ; C12.1@146.945,66.554 147.265,66.497 ; C12.1@146.945,66.554 147.265,66.497 ; C12.1@146.945,66.554 147.265,66.497 ; 147.265,66.497 cw(c147.16,65.906) 147.696,66.176 ; 147.265,66.497 cw(c147.16,65.906) 147.696,66.176 ; 147.265,66.497 cw(c147.16,65.906) 147.696,66.176 ; 147.265,66.497 cw(c147.16,65.906) 147.696,66.176 ; 147.696,66.176 147.697,66.175 ; 147.696,66.176 147.697,66.175 ; 147.696,66.176 147.697,66.175 ; 147.697,66.175 147.871,65.827 ; 147.697,66.175 147.871,65.827 ; 147.697,66.175 147.871,65.827 ; 147.871,65.827 cw(c147.335,65.558) 147.929,65.474 ; 147.871,65.827 cw(c147.335,65.558) 147.929,65.474 ; 147.871,65.827 cw(c147.335,65.558) 147.929,65.474 ; 147.871,65.827 cw(c147.335,65.558) 147.929,65.474 ; 152.29,100.503 cw(c152.174,99.914) 152.666,100.258 ; 152.29,100.503 cw(c152.174,99.914) 152.666,100.258 ; 152.29,100.503 cw(c152.174,99.914) 152.666,100.258 ; 152.29,100.503 cw(c152.174,99.914) 152.666,100.258 ; 153.268,99.398 cw(c152.776,99.055) 153.364,98.938 ; 153.268,99.398 cw(c152.776,99.055) 153.364,98.938 ; 153.268,99.398 cw(c152.776,99.055) 153.364,98.938 ; 153.268,99.398 cw(c152.776,99.055) 153.364,98.938
  Bottom Layer w0.6: PS1.3@131.802,58.023 132.332,60.445 ; v1(147.828,64.77) v1(140.97,65.913) 136.332,66.523 ccw(c136.254,65.928) 135.976,66.46 ; 132.332,60.445 132.333,60.447 ; 132.332,60.445 132.333,60.447 ; 132.332,60.445 132.333,60.447 ; 132.333,60.447 ccw(c131.746,60.573) 132.335,60.459 ; 132.333,60.447 ccw(c131.746,60.573) 132.335,60.459 ; 132.333,60.447 ccw(c131.746,60.573) 132.335,60.459 ; 132.333,60.447 ccw(c131.746,60.573) 132.335,60.459 ; 132.335,60.459 133.168,64.74 ; 133.168,64.74 133.168,64.742 ; 133.168,64.74 133.168,64.742 ; 133.168,64.74 133.168,64.742 ; 133.168,64.742 cw(c133.757,64.626) 133.479,65.158 ; 133.168,64.742 cw(c133.757,64.626) 133.479,65.158 ; 133.168,64.742 cw(c133.757,64.626) 133.479,65.158 ; 133.168,64.742 cw(c133.757,64.626) 133.479,65.158 ; 133.479,65.158 135.976,66.46 ; 133.479,65.158 135.976,66.46 ; 133.479,65.158 135.976,66.46
  other v1: 49.657,74.93 56.896,83.439
K1: U2.4 U4.1 | length 5.8
  Top Layer w0.5: U2.4@81.417,106.411 81.658,106.48 U4.1@87.114,107.268
K2: U4.2 U5.4 | length 7.8
  Top Layer w0.5: U5.4@83.068,101.077 83.309,101.146 84.883,101.775 ; 85.168,102.068 85.996,104.346 cw(c86.467,104.177) 86.424,104.675 U4.2@87.599,104.775 ; 84.883,101.775 ccw(c84.698,102.239) 85.167,102.067 ; 84.883,101.775 ccw(c84.698,102.239) 85.167,102.067 ; 84.883,101.775 ccw(c84.698,102.239) 85.167,102.067 ; 84.883,101.775 ccw(c84.698,102.239) 85.167,102.067
K3: U4.3 U6.4 | length 8.4
  Top Layer w0.5: U6.4@84.719,95.616 84.96,95.685 85.084,95.749 85.154,95.785 85.336,95.967 85.821,100.936 85.997,101.111 86.057,101.145 U4.3@88.084,102.282
K4: U4.4 U7.4 | length 17.7
  Top Layer w0.5: U7.4@86.37,90.282 U7.4@86.611,90.351 ; U4.4@88.568,99.788 87.651,99.423 ccw(c87.835,98.959) 87.339,99.022 87.007,96.363 ccw(c87.503,96.301) 87.02,96.173 87.979,92.576 ; U7.4@86.611,90.351 87.407,90.713 ; U7.4@86.611,90.351 87.407,90.713 ; U7.4@86.611,90.351 87.407,90.713 ; 87.407,90.713 ccw(c87.201,91.168) 87.688,91.054 ; 87.407,90.713 ccw(c87.201,91.168) 87.688,91.054 ; 87.407,90.713 ccw(c87.201,91.168) 87.688,91.054 ; 87.407,90.713 ccw(c87.201,91.168) 87.688,91.054 ; 87.688,91.054 87.688,91.056 ; 87.688,91.056 87.983,92.335 ; 87.688,91.056 87.983,92.335 ; 87.688,91.056 87.983,92.335 ; 87.979,92.575 cw(c87.496,92.447) 87.983,92.335 ; 87.979,92.575 cw(c87.496,92.447) 87.983,92.335 ; 87.979,92.575 cw(c87.496,92.447) 87.983,92.335 ; 87.979,92.575 cw(c87.496,92.447) 87.983,92.335 ; 87.979,92.575 87.979,92.576 ; 87.979,92.575 87.979,92.576 ; 87.979,92.575 87.979,92.576
MISO: J1.1 R16.2 U1.16 | length 39.6
  Top Layer w0.4: J1.1@45.085,56.093 45.602,56.489 v1(47.752,58.293) ; v1(50.927,60.706) 54.449,62.907 U1.16@54.471,63.013 ; v1(70.739,70.739) 71.743,71.319 R16.2@71.961,71.541
  Bottom Layer w0.4: v1(47.752,58.293) v1(50.927,60.706) 51.35,66.631 51.361,66.779 51.503,66.921 55.465,69.242 55.547,69.253 70.142,71.077 70.304,71.077 70.413,70.993 v1(70.739,70.739)
MOSI: J1.4 J3.6 U1.15 | length 50.8
  Top Layer w0.4: J3.6@25.2,58.87 25.02,58.697 24.112,57.769 ccw(c24.397,57.489) 23.998,57.502 23.882,54.147 ccw(c24.282,54.133) 23.998,53.852 32.26,45.466 ; 32.261,45.465 ccw(c32.545,45.747) 32.564,45.347 35.17,45.466 ; 35.171,45.466 cw(c35.188,45.066) 35.188,45.466 35.415,45.466 35.417,45.466 ccw(c35.415,45.866) 35.672,45.559 39.295,48.579 ccw(c39.039,48.886) 39.408,48.731 v1(41.402,53.467) ; J1.4@41.507,56.406 42.275,58.527 42.965,59.216 54.132,64.406 54.464,64.406 54.613,64.257 54.849,63.88 U1.15@55.149,63.436
  Bottom Layer w0.4: v1(41.402,53.467) J1.4@41.507,56.406
NetB1_M: B1.M Q2.3 | length 5.7
  Top Layer w0.4: v1(68.859,74.778) 68.859,74.333 69.139,74.053 Q2.3@69.788,74.053
  Bottom Layer w0.4: B1.M@67.04,78.278 67.04,76.597 v1(68.859,74.778)
NetC10_1: C10.1 R10.1 R12.2 | length 16.5
  Bottom Layer w2: R10.1@140.332,74.738 140.45,74.815 C10.1@143.316,82.367 R12.2@144.142,90.613
NetC10_2: C10.2 D1.4 F1.2 PS1.1 Q1.1 | length 112.7
  Top Layer w0.6: PS1.1@132.919,92.136 138.491,92.136 141.224,94.869 141.224,106.807 139.048,108.983 D1.4@135.95,108.983
  Bottom Layer w0.6: PS1.1@132.919,92.136 133.616,91.44 138.811,91.44 147.574,100.203 ; F1.2@180.341,96.604 180.622,97.299 165.921,104.108 ccw(c165.669,103.564) 165.77,104.155 165.768,104.156 150.238,106.765 ; 147.574,100.203 147.574,104.726 ; 147.574,100.203 147.574,104.726 ; 147.574,100.203 147.574,104.726 ; 147.574,100.203 147.574,104.726 ; 147.574,104.726 cw(c148.174,104.726) 147.818,105.209 ; 147.574,104.726 cw(c148.174,104.726) 147.818,105.209 ; 147.574,104.726 cw(c148.174,104.726) 147.818,105.209 ; 147.574,104.726 cw(c148.174,104.726) 147.818,105.209 ; 147.574,104.726 cw(c148.174,104.726) 147.818,105.209 ; 147.574,104.726 cw(c148.174,104.726) 147.818,105.209 ; 147.574,104.726 cw(c148.174,104.726) 147.818,105.209 ; 147.574,104.726 cw(c148.174,104.726) 147.818,105.209 ; 147.818,105.209 149.782,106.656 ; 147.818,105.209 149.782,106.656 ; 147.818,105.209 149.782,106.656 ; 149.782,106.656 cw(c150.138,106.173) 150.238,106.765 ; 149.782,106.656 cw(c150.138,106.173) 150.238,106.765 ; 149.782,106.656 cw(c150.138,106.173) 150.238,106.765 ; 149.782,106.656 cw(c150.138,106.173) 150.238,106.765 ; 149.782,106.656 cw(c150.138,106.173) 150.238,106.765 ; 149.782,106.656 cw(c150.138,106.173) 150.238,106.765 ; 149.782,106.656 cw(c150.138,106.173) 150.238,106.765 ; 149.782,106.656 cw(c150.138,106.173) 150.238,106.765
NetC12_2: C12.2 U9.6 | length 3.5
  Top Layer w0.5: U9.6@144.311,63.541 144.435,64.266 144.828,66.49 C12.2@144.91,66.958
NetC19_1: C19.1 J8.2 L1.2 VR1.2 | length 25.7
  Bottom Layer w2: J8.2@181.483,36.576 179.578,34.671 179.578,32.385 185.42,26.543 192.672,26.543 VR1.2@196.379,30.25
NetC19_2: C19.2 J8.3 L1.3 VR1.1
NetC20_1: C20.1 C22.2 D1.3 J7.2 L1.1 PS1.2 R19.1 | length 240.7
  Bottom Layer w0.5: D1.3@135.065,103.96 127.05,95.946 PS1.2@127.05,93.384 131.057,96.05 131.183,96.133 131.393,96.133 138.885,94.35 139.15,94.35 139.302,94.501 139.307,94.507 ; R19.1@205.378,77.919 204.187,77.752 196.786,82.761 ; 139.307,94.507 144.897,100.439 ; 139.307,94.507 144.897,100.439 ; 139.307,94.507 144.897,100.439 ; 144.897,100.439 ccw(c144.534,100.782) 145.034,100.782 ; 144.897,100.439 ccw(c144.534,100.782) 145.034,100.782 ; 144.897,100.439 ccw(c144.534,100.782) 145.034,100.782 ; 144.897,100.439 ccw(c144.534,100.782) 145.034,100.782 ; 144.897,100.439 ccw(c144.534,100.782) 145.034,100.782 ; 144.897,100.439 ccw(c144.534,100.782) 145.034,100.782 ; 144.897,100.439 ccw(c144.534,100.782) 145.034,100.782 ; 144.897,100.439 ccw(c144.534,100.782) 145.034,100.782 ; 145.034,100.782 145.034,101.466 ; 145.034,100.782 145.034,101.466 ; 145.034,100.782 145.034,101.466 ; 145.034,101.466 cw(c145.534,101.466) 145.034,101.48 ; 145.034,101.466 cw(c145.534,101.466) 145.034,101.48 ; 145.034,101.466 cw(c145.534,101.466) 145.034,101.48 ; 145.034,101.466 cw(c145.534,101.466) 145.034,101.48 ; 145.034,101.466 cw(c145.534,101.466) 145.034,101.48 ; 145.034,101.466 cw(c145.534,101.466) 145.034,101.48 ; 145.034,101.466 cw(c145.534,101.466) 145.034,101.48 ; 145.034,101.466 cw(c145.534,101.466) 145.034,101.48 ; 145.034,101.48 145.154,105.67 cw(c145.654,105.655) 145.364,106.062 ; 145.364,106.062 149.826,109.233 ; 145.364,106.062 149.826,109.233 ; 145.364,106.062 149.826,109.233 ; 149.826,109.233 cw(c150.116,108.825) 150.181,109.321 ; 149.826,109.233 cw(c150.116,108.825) 150.181,109.321 ; 149.826,109.233 cw(c150.116,108.825) 150.181,109.321 ; 149.826,109.233 cw(c150.116,108.825) 150.181,109.321 ; 149.826,109.233 cw(c150.116,108.825) 150.181,109.321 ; 149.826,109.233 cw(c150.116,108.825) 150.181,109.321 ; 149.826,109.233 cw(c150.116,108.825) 150.181,109.321 ; 149.826,109.233 cw(c150.116,108.825) 150.181,109.321 ; 150.181,109.321 150.182,109.321 ; 150.181,109.321 150.182,109.321 ; 150.181,109.321 150.182,109.321 ; 150.182,109.321 151.884,109.094 ; 151.884,109.094 cw(c151.818,108.598) 151.898,109.092 ; 151.884,109.094 cw(c151.818,108.598) 151.898,109.092 ; 151.884,109.094 cw(c151.818,108.598) 151.898,109.092 ; 151.884,109.094 cw(c151.818,108.598) 151.898,109.092 ; 151.884,109.094 cw(c151.818,108.598) 151.898,109.092 ; 151.884,109.094 cw(c151.818,108.598) 151.898,109.092 ; 151.884,109.094 cw(c151.818,108.598) 151.898,109.092 ; 151.884,109.094 cw(c151.818,108.598) 151.898,109.092 ; 151.898,109.092 151.9,109.092 ; 151.898,109.092 151.9,109.092 ; 151.898,109.092 151.9,109.092 ; 151.9,109.092 166.446,106.688 ; 151.9,109.092 166.446,106.688 ; 151.9,109.092 166.446,106.688 ; 166.446,106.688 cw(c166.365,106.195) 166.544,106.662 ; 166.446,106.688 cw(c166.365,106.195) 166.544,106.662 ; 166.446,106.688 cw(c166.365,106.195) 166.544,106.662 ; 166.446,106.688 cw(c166.365,106.195) 166.544,106.662 ; 166.446,106.688 cw(c166.365,106.195) 166.544,106.662 ; 166.446,106.688 cw(c166.365,106.195) 166.544,106.662 ; 166.446,106.688 cw(c166.365,106.195) 166.544,106.662 ; 166.446,106.688 cw(c166.365,106.195) 166.544,106.662 ; 166.545,106.662 188.08,98.35 ; 166.545,106.662 188.08,98.35 ; 166.545,106.662 188.08,98.35 ; 188.08,98.35 cw(c187.9,97.883) 188.299,98.184 ; 188.08,98.35 cw(c187.9,97.883) 188.299,98.184 ; 188.08,98.35 cw(c187.9,97.883) 188.299,98.184 ; 188.08,98.35 cw(c187.9,97.883) 188.299,98.184 ; 188.08,98.35 cw(c187.9,97.883) 188.299,98.184 ; 188.08,98.35 cw(c187.9,97.883) 188.299,98.184 ; 188.08,98.35 cw(c187.9,97.883) 188.299,98.184 ; 188.08,98.35 cw(c187.9,97.883) 188.299,98.184 ; 188.3,98.183 190.803,94.846 ; 188.3,98.183 190.803,94.846 ; 188.3,98.183 190.803,94.846 ; 190.803,94.846 cw(c190.403,94.546) 190.898,94.614 ; 190.803,94.846 cw(c190.403,94.546) 190.898,94.614 ; 190.803,94.846 cw(c190.403,94.546) 190.898,94.614 ; 190.803,94.846 cw(c190.403,94.546) 190.898,94.614 ; 190.803,94.846 cw(c190.403,94.546) 190.898,94.614 ; 190.803,94.846 cw(c190.403,94.546) 190.898,94.614 ; 190.803,94.846 cw(c190.403,94.546) 190.898,94.614 ; 190.803,94.846 cw(c190.403,94.546) 190.898,94.614 ; 190.899,94.613 191.624,89.292 ; 191.624,89.292 ccw(c192.12,89.358) 191.729,89.047 ; 191.624,89.292 ccw(c192.12,89.358) 191.729,89.047 ; 191.624,89.292 ccw(c192.12,89.358) 191.729,89.047 ; 191.624,89.292 ccw(c192.12,89.358) 191.729,89.047 ; 191.624,89.292 ccw(c192.12,89.358) 191.729,89.047 ; 191.624,89.292 ccw(c192.12,89.358) 191.729,89.047 ; 191.624,89.292 ccw(c192.12,89.358) 191.729,89.047 ; 191.624,89.292 ccw(c192.12,89.358) 191.729,89.047 ; 191.729,89.046 196.677,82.862 ; 196.677,82.862 ccw(c197.066,83.176) 196.785,82.762 ; 196.677,82.862 ccw(c197.066,83.176) 196.785,82.762 ; 196.677,82.862 ccw(c197.066,83.176) 196.785,82.762 ; 196.677,82.862 ccw(c197.066,83.176) 196.785,82.762 ; 196.677,82.862 ccw(c197.066,83.176) 196.785,82.762 ; 196.677,82.862 ccw(c197.066,83.176) 196.785,82.762 ; 196.677,82.862 ccw(c197.066,83.176) 196.785,82.762 ; 196.677,82.862 ccw(c197.066,83.176) 196.785,82.762 ; 196.785,82.762 196.786,82.761 ; 196.785,82.762 196.786,82.761 ; 196.785,82.762 196.786,82.761
NetC20_2: C20.2 C21.2 F1.1 L1.4 R19.2
NetD1_1: D1.1 R14.1 | length 20.7
  Top Layer w0.6: D1.1@127.825,110.416 130.376,110.416 131.318,109.474 131.318,100.711 134.112,97.917 137.668,97.917 R14.1@138.049,97.536
NetD1_2: D1.2 U10.2 | length 18.2
  Top Layer w0.6: U10.2@113.85,96.701 113.902,96.753 113.902,99.297 120.015,105.41 126.923,105.41 D1.2@126.94,105.393
NetJ2_3: J2.3 U1.23 | length 31.7
  Top Layer w0.5: J2.3@48.895,34.544 57.484,43.133 57.484,47.113 57.785,47.413 v1(57.785,51.181) ; U1.23@56.578,57.054 57.003,57.29 57.846,57.749 cw(c58.085,57.31) 57.986,57.8 57.987,57.8 58.435,57.8 v1(59.309,58.674)
  Bottom Layer w0.5: v1(57.785,51.181) 57.785,57.15 v1(59.309,58.674)
NetJ2_4: J2.4 U1.24 | length 24.1
  Top Layer w0.5: J2.4@47.131,36.371 51.82,41.061 51.82,46.232 56.007,50.419 56.007,54.102 56.117,55.422 cw(c56.615,55.381) 56.252,55.724 56.604,56.097 U1.24@57.002,56.376
NetJ2_5: J2.5 U1.25 | length 25.1
  Top Layer w0.5: J2.5@45.366,38.198 50.8,43.632 50.8,46.736 v1(55.118,51.054) ; v1(56.769,51.943) 58.166,51.943 59.563,53.34 59.563,54.433 ccw(c59.063,54.433) 59.553,54.532 59.455,55.021 ; U1.25@58.89,55.94 59.165,55.539 59.352,55.24 cw(c58.965,54.923) 59.455,55.022
  Bottom Layer w0.5: v1(55.118,51.054) 55.988,51.924 56.75,51.924 v1(56.769,51.943)
NetJ2_6: J2.6 U1.9 | length 33.1
  Top Layer w0.5: J2.6@43.602,40.025 50.038,46.462 50.038,47.117 54.864,51.943 v1(54.864,56.515) ; U1.9@59.22,65.98 59.498,65.582 v1(60.198,64.516)
  Bottom Layer w0.5: v1(54.864,56.515) 60.198,61.849 v1(60.198,64.516)
NetJ2_7: J2.7 U1.2 | length 32.6
  Top Layer w0.6: J2.7@41.837,41.852 53.989,54.005 53.989,58.025 v1(53.975,58.039) ; v1(58.039,61.087) 58.547,60.579 62.057,60.579 ccw(c62.057,61.179) 62.377,60.671 U1.2@63.651,61.474
  Bottom Layer w0.6: v1(53.975,58.039) 57.023,61.087 v1(58.039,61.087)
NetJ3_1: J3.1 U1.10 | length 34
  Top Layer w0.4: J3.1@34.022,49.735 34.624,50.264 35.075,50.699 ccw(c34.797,50.987) 35.195,50.944 35.672,55.363 ; 35.672,55.364 cw(c36.07,55.32) 35.774,55.589 40.448,60.734 40.524,60.81 v1(53.086,64.77) ; v1(57.277,67.564) 58.251,66.006 U1.10@58.541,65.556
  Bottom Layer w0.4: v1(53.086,64.77) v1(57.277,67.564)
NetJ3_2: J3.2 U1.11 | length 34.1
  Top Layer w0.4: J3.2@32.258,51.562 32.438,51.736 33.307,52.61 ccw(c33.023,52.892) 33.419,52.838 33.813,55.73 33.832,55.863 33.935,55.967 40.042,61.426 40.119,61.452 52.471,65.632 52.63,65.632 52.714,65.59 v1(52.832,65.532) ; v1(55.88,67.945) 57.652,65.555 U1.11@57.863,65.132
  Bottom Layer w0.4: v1(52.832,65.532) 53.667,66.367 54.302,66.367 v1(55.88,67.945)
NetJ3_3: J3.3 U1.12 | length 33.9
  Top Layer w0.4: J3.3@30.494,53.389 30.673,53.563 31.453,54.11 ccw(c31.223,54.437) 31.623,54.437 31.623,56.867 31.74,56.984 31.766,57.01 39.379,62.244 39.438,62.262 v1(52.578,66.294) ; v1(54.102,67.585) 54.229,67.564 55.119,67.564 55.353,67.33 57.007,65.105 U1.12@57.184,64.708
  Bottom Layer w0.4: v1(52.578,66.294) 53.831,67.547 54.063,67.547 v1(54.102,67.585)
NetJ3_4: J3.4 U1.13 | length 33.1
  Top Layer w0.4: J3.4@28.729,55.216 28.905,55.386 38.675,64.487 38.752,64.56 48.397,66.84 48.439,66.841 54.252,66.961 54.256,66.961 54.421,66.961 55.367,66.056 55.37,66.053 ; 55.37,66.053 55.401,66.022 55.425,65.985 U1.13@56.506,64.284
NetJ4_4: J4.4 R2.2 | length 3.1
  Top Layer w0.4: R2.2@76.403,41.326 76.403,40.387 77.268,39.522 J4.4@77.268,38.584